# Altium PCB PCB.PcbDoc
Units mil, origin at the board's own origin, x right, y up, seen from the top; angles counter-clockwise.
Board outline 2245 x 2250 mil, 2 copper layers (Top Layer, Bottom Layer); 25 components, 27 nets, 96 pads, 2 vias.
Unrouted connection lines stored in the file: 1.
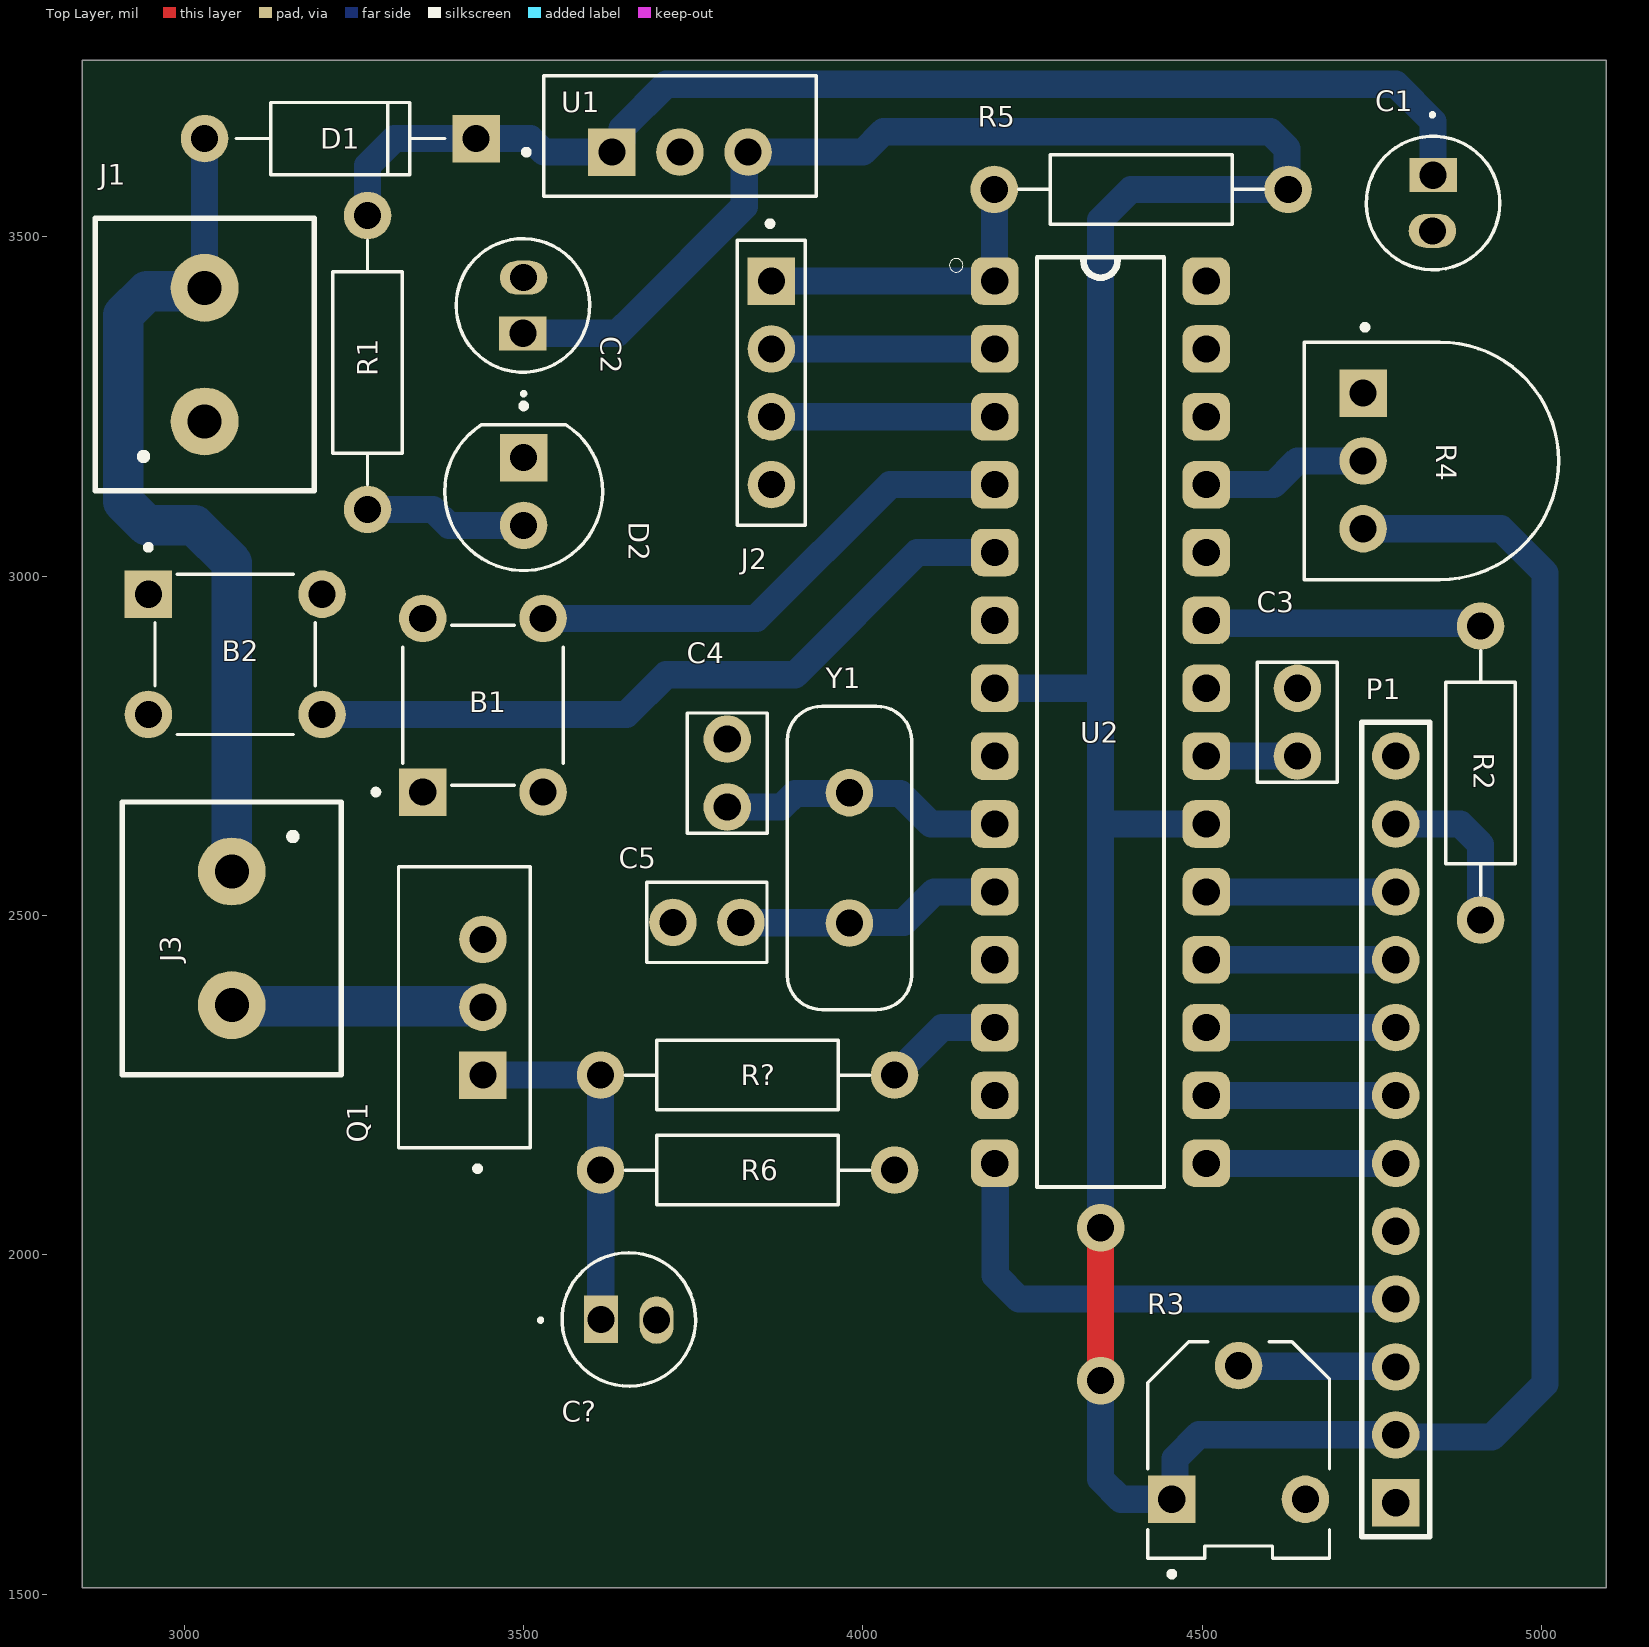
[diagram p0: Top Layer view]
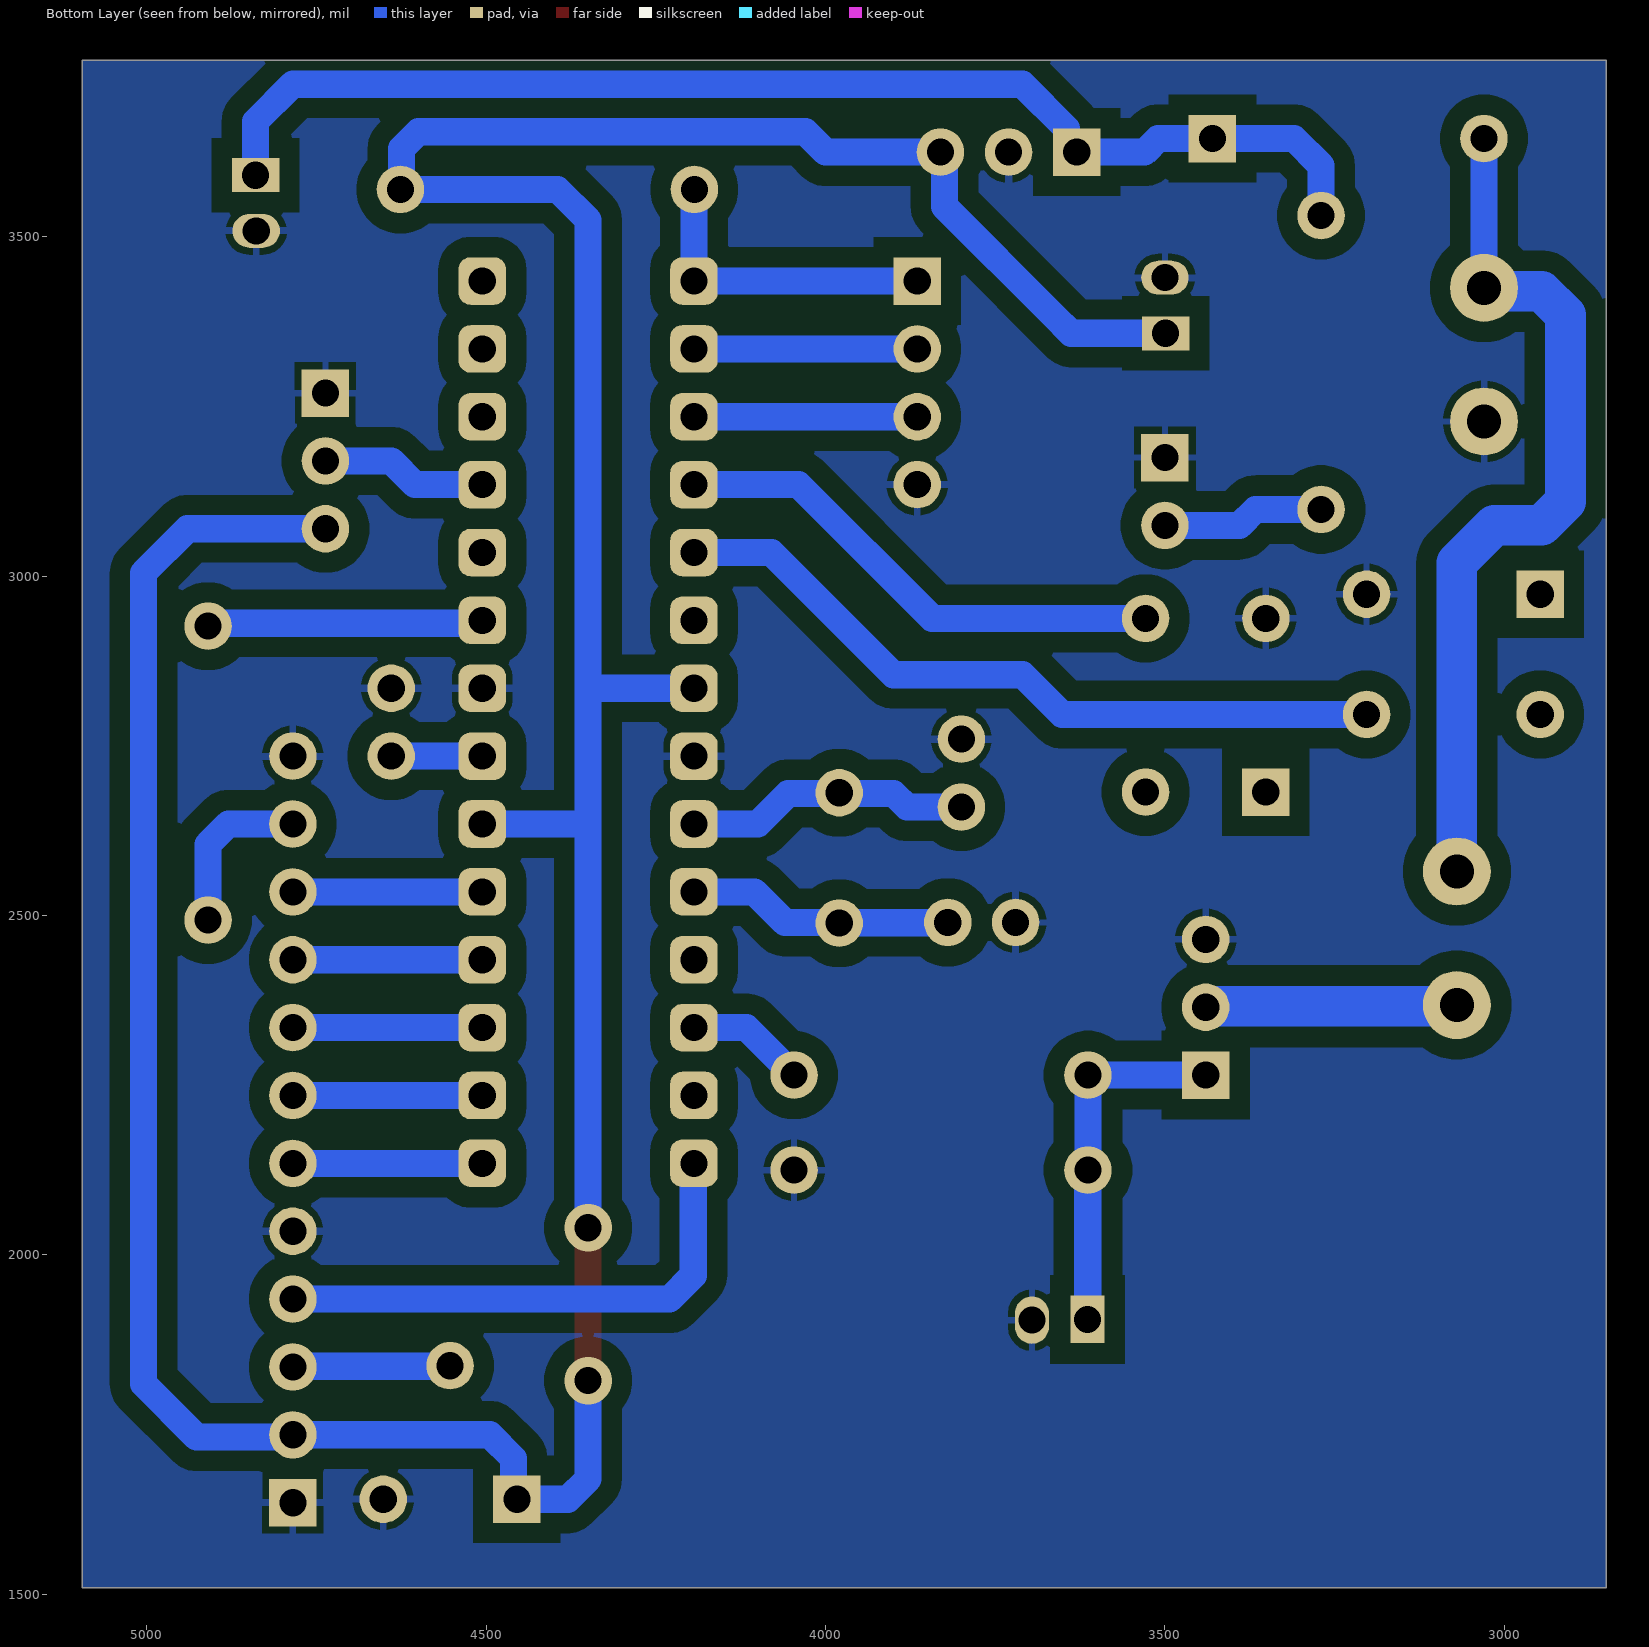
[diagram p1: Bottom Layer view, seen from below]
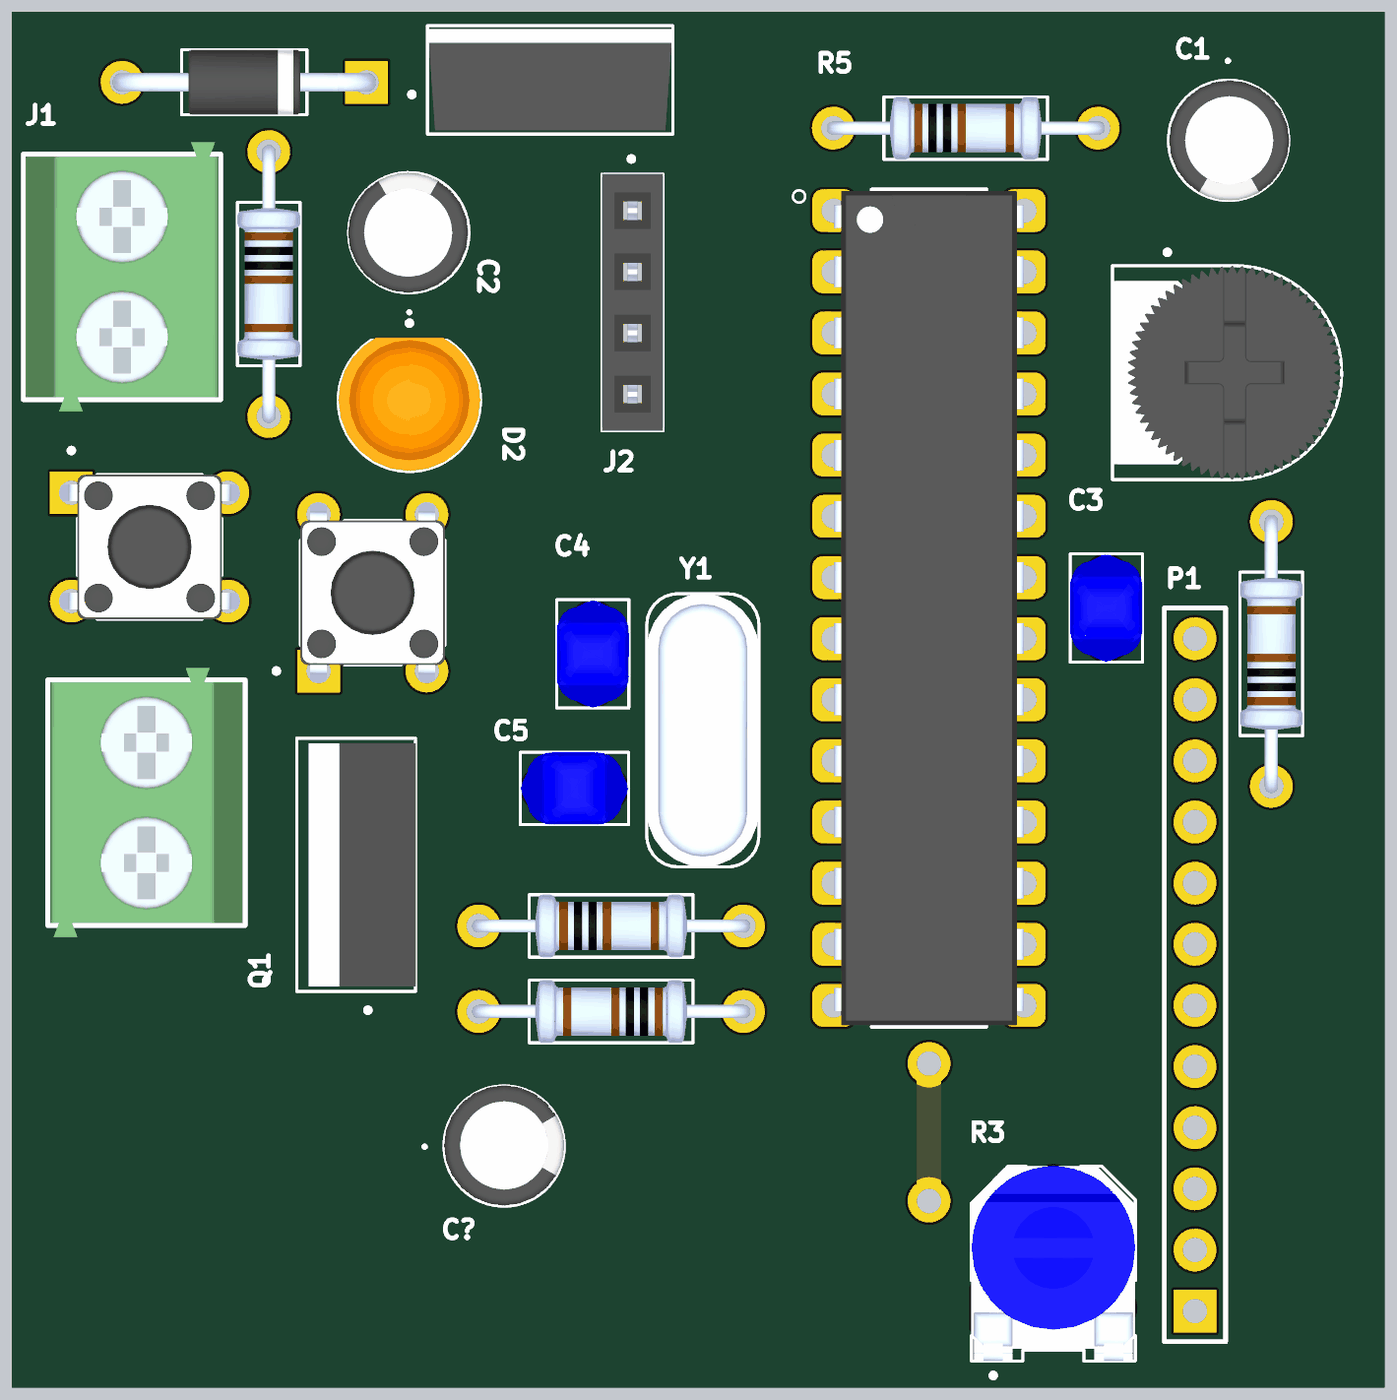
[diagram p2: 3D render of the assembled board from above, using the file's embedded part models]

## Layer stack, top to bottom
Top Solder: solder mask 0.4, Solder Resist, Dk 3.5
Top Layer: signal copper 1.4
Dielectric 1: dielectric 12.6, FR-4, Dk 4.8
Bottom Layer: signal copper 1.4
Bottom Solder: solder mask 0.4, Solder Resist, Dk 3.5

## Board outline
2850,1510 5095,1510 5095,3760 2850,3760

## Design rules (kind name [scope] priority, off if disabled: settings)
Clearance [All] p1: gap=30 ignorepadtopadclearanceinfootprint=FALSE
PolygonConnect [All] p1: connectstyle=Relief reliefconductorwidth=10 reliefentries=4 polygonreliefangle="90 Angle" airgapwidth=10
RoutingVias [All] p1: holewidth=40 width=70 viastyle="Through Hole" minholewidth=40 minwidth=70 maxholewidth=40 maxwidth=70
SolderMaskExpansion [All] p1: expansion=4 istentingtop=FALSE
Width [All] p1: maxlimit=60 minlimit=40 preferedwidth=50
30 further rules are at their usual default settings.

## Components (designator, comment, footprint, x,y, rotation, side; value= is the part's Value field where it differs from the comment)
B1 "Push button" SW_TS02-66-95-BK-260-LCR-D 3440,2810 r90 top
B2 "Push button" SW_TS02-66-95-BK-260-LCR-D 3075,2885 r0 top
C1 "100uF" CAPPRD500W50D500H1100 4840,3550 r270 top
C2 "10uF" CAPPRD500W50D500H1100 3499,3399 r90 top
C3 "100nF" CAPRB500W50L450T300H550 4640,2735 r90 top
C4 "22pF" CAPRB500W50L450T300H550 3800,2660 r90 top
C5 "22pF" CAPRB500W50L450T300H550 3820,2490 r180 top
C? "100uF" CAPPRD500W50D500H1100 3655,1905 r0 top
D1 "1N4007" DIOAD1060W80L520D270 3230,3645 r180 top
D2 "L08R5000Q1" LEDRD254W57D500H1070 3500,3125 r270 top
J1 "TBlock 2" 691111710002 3030,3326.57 r90 top
J2 "Header 4" SULLINS_PPTC041LFBN-RC 3865,3285 r270 top
J3 "TBlock 2" 691111710002 3070,2466.57 r270 top
P1 "Header 12" HDR1X12 4785,1635 r90 top
Q1 "N-Channel mosfet" TO254P1052X465X1989-3 3440,2265 r90 top
R1 "10k" RESAD1100W55L680D260 3270,3315 r90 top
R2 "220" RESAD1100W55L680D260 4910,2710 r270 top
R3 "1k" TRIM_3306F-1-105 4553.43,1738.43 r90 top
R4 "3352T-1-254LF" TRIM_3352T-1-254LF 4850,3170 r270 top
R5 "10k" RESAD1100W55L680D260 4410,3570 r180 top
R6 "10k" RESAD1100W55L680D260 3830,2125 r0 top
R? "10k" RESAD1100W55L680D260 3830,2265 r180 top
U1 "LM7805" TO255P1020X450X1968-3 3730.39,3648.82 r0 top
U2 "ATMEGA328P-PU" DIP794W46P254L2967H457Q28B 4350,2785 r0 top
Y1 "16MHz" XTAL_ECS-160-20-4X 3980,2585 r270 top

## Footprints (in the part's own frame and the unit in brackets; to place one, negate y for a bottom-side part, rotate by r counter-clockwise, add the part's x,y. Pads: shape width x height; smd on the part's side, far side on the other; paste and mask are expansions set on the pad)
691111710002 [mm]
  round 2.54 hole 1.27: 1(-2.5,0) 2(2.5,0)
  silkscreen extent -5.1,-4.1 5.1,4.1, body extent -5.6,-4 5.6,4, height 11.01
CAPPRD500W50D500H1100 [mil]
  oval 50x70 hole 40: N(41,-1)
  rect 50x70 hole 40: P(-41,0)
  silkscreen extent -131,-98 98,98, body extent -108,-97 108,99, height 434
CAPRB500W50L450T300H550 [mil]
  round 70 hole 40: 1(0,0) 2(100,0)
  silkscreen extent -39,-59 139,59, body extent -38,-59 138,59, height 210
DIOAD1060W80L520D270 [mil]
  round 70 hole 40: A(200,0)
  rect 70x70 hole 40: C(-200,0)
  silkscreen extent -154,-53 154,53, body extent -216,-53 216,53, height 99
DIP794W46P254L2967H457Q28B [mil]
  rrect50% 70x70 hole 40: 1(-155.91,650) 2(-155.91,550) 3(-155.91,450) 4(-155.91,350) 5(-155.91,250) 6(-155.91,150) 7(-155.91,50) 8(-155.91,-50) 9(-155.91,-150) 10(-155.91,-250) 11(-155.91,-350) 12(-155.91,-450) 13(-155.91,-550) 14(-155.91,-650) 15(155.91,-650) 16(155.91,-550) 17(155.91,-450) 18(155.91,-350) 19(155.91,-250) 20(155.91,-150) 21(155.91,-50) 22(155.91,50) 23(155.91,150) 24(155.91,250) 25(155.91,350) 26(155.91,450) 27(155.91,550) 28(155.91,650)
  silkscreen extent -223,-685 94,685, body extent -156,-682 156,683, height 180
HDR1X12 [mil] "Connector; Header; 12 Position"
  rect 70x70 hole 40: 1(0,0)
  round 70 hole 40: 2(100,0) 3(200,0) 4(300,0) 5(400,0) 6(500,0) 7(600,0) 8(700,0) 9(800,0) 10(900,0) 11(1000,0) 12(1100,0)
  silkscreen extent -50,-50 1150,50
LEDRD254W57D500H1070 [mil]
  round 70 hole 40: A(50,0)
  rect 70x70 hole 40: C(-50,0)
  silkscreen extent -130,-116 116,116, body extent -102,-116 116,116, height 358
RESAD1100W55L680D260 [mil]
  round 70 hole 40: 1(-216.54,0) 2(216.54,0)
  silkscreen extent -180,-51 180,51, body extent -227,-51 227,51, height 101
SULLINS_PPTC041LFBN-RC [mil]
  rect 70x70 hole 40: 1(-150,0)
  round 70 hole 40: 2(-50,0) 3(50,0) 4(150,0)
  silkscreen extent -239,-50 210,50, body extent -210,-50 210,50, height 335
SW_TS02-66-95-BK-260-LCR-D [mil]
  rect 70x70 hole 40: 1(-127.95,88.58)
  round 70 hole 40: 2(127.95,88.58) 3(-127.95,-88.58) 4(127.95,-88.58)
  silkscreen extent -132,-118 118,162, body extent -156,-118 155,118, height 382
TO254P1052X465X1989-3 [mil]
  rect 70x70 hole 40: 1(0,0)
  round 70 hole 40: 2(100,0) 3(200,0)
  silkscreen extent -142,-70 307,124, body extent -99,-70 299,105, height 781
TO255P1020X450X1968-3 [mil]
  rect 70x70 hole 40: 1(-100.39,-23.82)
  round 70 hole 40: 2(0,-23.82) 3(100.39,-23.82)
  silkscreen extent -230,-89 201,89, body extent -200,-82 200,83, height 901
TRIM_3306F-1-105 [mil]
  rect 70x70 hole 40: 1(-98.43,98.43)
  round 70 hole 40: 2(98.43,0) 3(-98.43,-98.43)
  silkscreen extent -213,-134 134,134, body extent -185,-134 134,134, height 330
TRIM_3352T-1-254LF [mil]
  rect 70x70 hole 40: 1(-100,-112.99)
  round 70 hole 40: 2(0,-112.99) 3(100,-112.99)
  silkscreen extent -201,-200 175,175, body extent -175,-200 175,175, height 170
XTAL_ECS-160-20-4X [mil]
  round 70 hole 40: 1(-96.06,0) 2(96.06,0)
  silkscreen extent -223,-92 223,92, body extent -223,-92 223,92, height 138

## Part data
C1 C2 C?: library part "Electrolytic capacitor", "FS-A", Package=None, Availability=Unavailable, MF="{'manufacturer': u'Panasonic'}", MP=EEUFS0J221B, Price=None
C3 C4 C5: library part "Ceramic capacitor", "2200 pF Â±10% 250V Ceramic Capacitor X7R Radial", Package="Radial TDK", Check_prices=https://www.snapeda.com/parts/FG24X7R2E222KNT06/TDK/view-part/?ref=eda, Digi-Key_Part_Number=445-173386-1-ND, MF=TDK, MP=FG24X7R2E222KNT06, Purchase-URL=https://pricing.snapeda.com/search/part/FG24X7R2E222KNT06/?ref=eda, SnapEDA_Link=https://www.snapeda.com/parts/FG24X7R2E222KNT06/TDK/view-part/?ref=snap
D1: "Diode Switching 1KV 1A 2-Pin DO-41", Package=None, Availability=Unavailable, MP=1N4007, Price=None
D2: library part LED, "LED, Orange, Through Hole, T-1 3/4 (5mm), 30 mA, 2.1 V, 635 nm", Package=None, Availability=Unavailable, MF="{'manufacturer': u'LED Technology'}", MP=L08R5000Q1, Price=None
J1 J3: library part "Terminal Block - 2Pins", "2 Position Wire to Board Terminal Block Horizontal with Board 0.197 _5.00mm_ Through Hole", Package=None, Availability=Unavailable, MF="Wurth Electronics", MP=691111710002, Price=None, SnapEDA_Link=https://www.snapeda.com/parts/691111710002/Wurth%20Electronics%20Inc./view-part/1195092/?ref=snap
J2: library part "Female header - 4Pins", "4 Position Header Connector Through Hole", Package=None, Availability=Warning, Check_prices=https://www.snapeda.com/parts/PPTC041LFBN-RC/Sullins%20Connector%20Solutions/view-part/285917/?ref=eda, MF="Sullins Connector", MP=PPTC041LFBN-RC, Price=None, Purchase-URL=https://pricing.snapeda.com/search/part/PPTC041LFBN-RC/?ref=eda, SnapEDA_Link=https://www.snapeda.com/parts/PPTC041LFBN-RC/Sullins%20Connector%20Solutions/view-part/285917/?ref=snap
P1: "Header, 12-Pin", LatestRevisionDate=17-Jul-2002, LatestRevisionNote="Re-released for DXP Platform.", Publisher="Altium Limited"
Q1: library part IRF540, "N-Channel 100V 22A (Tc) 85W (Tc) Through Hole TO-220AB", Package=None, Availability=Unavailable, MP=IRF540, Price=None
R1 R2 R5 R6 R?: library part "Resistor (0.25W)", "(MFR-25FBF52-10K) 10,2 kOhm bei 1% 0,25W, 1/4W Durchbohrlochwiderstand Axial Metal Film", Package="Axial Yageo", Digi-Key_Part_Number=10.2KXBK-ND, MF=Yageo, MP=MFR-25FBF52-10K, Purchase-URL=https://pricing.snapeda.com/search/part/MFR-25FBF52-10K/?ref=eda, SnapEDA_Link=https://www.snapeda.com/parts/MFR-25FBF52-10K/Yageo/view-part/424333/?ref=snap
R3: library part Potentiometer1, "(3306F-1-105) 1 MOhms 0.2W, 1/5W PC Pins Through Hole Trimmer Potentiometer Cermet 1 Turn Top Adjustment", Package="3306F Bourns", Availability=Good, Check_prices=https://www.snapeda.com/parts/3306F-1-105/Bourns%20-%20J.W.%20Miller/view-part/862876/?ref=eda, MF=Bourns, MP=3306F-1-105, Price=None, Purchase-URL=https://pricing.snapeda.com/search/part/3306F-1-105/?ref=eda, SnapEDA_Link=https://www.snapeda.com/parts/3306F-1-105/Bourns%20-%20J.W.%20Miller/view-part/862876/?ref=snap
R4: library part "Variable resistor", "RESISTOR, VARIABLE, 250KOHM, 0.5W, Â±20%; Track Resistance:250kohm; No. of Turns:1; Resistance Tolerance:Â± 20%; Temperature Coefficient:Â± 100ppm/Â°C; Power Rating:500mW; Potentiometer Mounting:Through Hole ;RoHS Compliant: Yes", Package="3352T-3 Bourns", Availability="In Stock", Check_prices=https://www.snapeda.com/parts/3352T-1-254LF/Bourns/view-part/?ref=eda, MF=Bourns, MP=3352T-1-254LF, Price=None, Purchase-URL=https://pricing.snapeda.com/search/part/3352T-1-254LF/?ref=eda, SnapEDA_Link=https://www.snapeda.com/parts/3352T-1-254LF/Bourns/view-part/?ref=snap
U1: library part LM78__, Package=None, Availability=Unavailable, MP=LM7805CT/NOPB, Price=None
U2: "ATmega Series 20 MHz 32 KB Flash 2 KB SRAM 8-Bit Microcontroller - DIP-28", Package=None, Availability=Unavailable, MP=ATMEGA328P-PU, Price=None
Y1: library part "Crystal oscilator", "CRYSTAL T/H", Package=None, Availability=Unavailable, MF="{'manufacturer': u'ECS Inc.'}", MP=ECS-160-S-4, Price=None

## Via types
v1: diameter 70, hole 40, Top Layer to Bottom Layer, 2 vias

## Nets (pads, with @x,y where several pads share a name; then routed paths per layer and width w, separated by ;. In a path a pad name is that pad's centre, name@x,y a point inside that pad or via, vN(x,y) a via of type N, cw(c..) or ccw(c..) an arc to the next point about the centre after c; other vN are vias at no path point)
backlight: R2.1 U2.23 | length 417.6
  Bottom Layer w40: U2.23 4510.14,2930.77 4915.77,2930.77 R2.1@4920,2926.54
Battery: D1.A J1.2 J3.1 | length 1283.7
  Bottom Layer w40: J1.2@3025,3420 J1.2 D1.A
  Bottom Layer w60: J1.2@3025,3420 2945.15,3420 2910,3384.85 2910,3110.15 2945.15,3075 3015,3075 3070,3020 J3.1
button1: B1.4 U2.4 | length 747.1
  Bottom Layer w40: B1.4 3842.95,2937.95 4040,3135 U2.4
button2: B2.4 U2.5 | length 1090
  Bottom Layer w40: B2.4 3651.42,2796.42 3710,2855 3900,2855 4080,3035 U2.5
D4: P1.7 U2.16 | length 279.1
  Bottom Layer w40: U2.16 P1.7
D5: P1.8 U2.17 | length 279.1
  Bottom Layer w40: U2.17 P1.8
D6: P1.9 U2.18 | length 279.1
  Bottom Layer w40: U2.18 P1.9
D7: P1.10 U2.19 | length 279.1
  Bottom Layer w40: U2.19 P1.10
EN: P1.6 U2.15 | length 279.1
  Bottom Layer w40: U2.15 P1.6
GND: B1.2 B2.2 C1.N C2.N C3.2 C4.2 C5.2 C?.N D2.C J1.1 J2.4 P1.1 P1.5 P1.12 Q1.3 R3.3 R4.1 R6.2 U1.2 U2.8 U2.22
jack_motor: R?.1 U2.12 | length 176.6
  Bottom Layer w40: R?.1 4116.54,2335 U2.12
NetC1_P: C1.P D1.C R1.2 U1.1 | length 1823.1
  Bottom Layer w40: R1.2 3270,3605 3310,3645 D1.C 3510,3645 3530,3625 U1.1 3645,3640 3645,3659.81 3710.19,3725 4785,3725 4840,3670 C1.P
NetC3_1: C3.1 U2.21 | length 134.1
  Bottom Layer w40: U2.21 C3.1
NetC?_P: C?.P Q1.1 R6.1 R?.2 | length 533.7
  Bottom Layer w40: Q1.1 R?.2 R6.1 3613.73,2124.73 3613.73,1905.27 C?.P
NetD2_A: D2.A R1.1 | length 239.7
  Bottom Layer w40: R1.1 3366.54,3098.46 3390,3075 D2.A
NetJ3_2: J3.2 Q1.2 | length 371.3
  Bottom Layer w40: J3.2 J3.2@3071.57,2366.57 ; Q1.2@3438.43,2366.57 Q1.2
  Bottom Layer w60: J3.2@3071.57,2366.57 Q1.2@3438.43,2366.57
NetP1_3: P1.3 R3.2 | length 232.3
  Bottom Layer w40: R3.2 4554.35,1835.93 4784.07,1835.93 P1.3
NetP1_11: P1.11 R2.2 | length 249
  Bottom Layer w40: P1.11 4880,2635 4910,2605 R2.2
NetR4_2: R4.2 U2.25 | length 245.6
  Bottom Layer w40: U2.25 4605,3135 4640,3170 R4.2
reset: J2.1 R5.2 U2.1 | length 464.4
  Bottom Layer w40: J2.1 U2.1 4193.78,3435.32 4193.78,3569.69 R5.2
RS: P1.4 U2.14 | length 769.9
  Bottom Layer w40: U2.14 4195,2134.09 4195,1970 4230,1935 P1.4
rx: J2.3 U2.3 | length 329.1
  Bottom Layer w40: J2.3 U2.3
thermistor: U2.24
tx: J2.2 U2.2 | length 329.1
  Bottom Layer w40: J2.2 U2.2
VCC: C2.P P1.2 R3.1 R4.3 R5.1 U1.3 U2.7 U2.20 | length 6090.4
  Top Layer w40: v1(4350,1815) v1(4350,2040)
  Bottom Layer w40: C2.P 3638,3358 3665,3385 3825.05,3545.05 3825.05,3619.26 U1.3 4000,3625 4030,3655 4600,3655 4625,3630 4625,3571.54 R5.1 4395,3570 4350,3525 4350,2835 ; U2.7 4350,2835 ; v1(4350,1815) 4350,1670 4380,1640 R3.1 4460,1645 4460,1700 4495,1735 P1.2 4788.43,1731.57 4926.57,1731.57 5005,1810 5005,3005 4940,3070 R4.3 ; v1(4350,2040) 4350,2630 ; U2.20 4355,2635 4350,2630 ; 4350,2630 4350,2835
xtal1: C4.1 U2.9 Y1.1 | length 421.9
  Bottom Layer w40: C4.1 3880,2660 3900,2680 3978.94,2680 Y1.1 3981.06,2680 4055,2680 4100,2635 U2.9
xtal2: C5.1 U2.10 Y1.2 | length 393.6
  Bottom Layer w40: C5.1 3820.53,2489.47 3979.47,2489.47 Y1.2 3981.06,2490 4060,2490 4105,2535 U2.10
pads on no net: B1.1 B1.3 B2.1 B2.3 U2.6 U2.11 U2.13 U2.26 U2.27 U2.28

## Polygon pours and split planes (outlines as drawn)
GND on Bottom Layer "GND_L02_P000" (solid, pour order 0): 2850,3760 2850,1510 5095,1510 5095,3760